# Altium PCB BBTC-PSU.PcbDoc
Units mil, origin at the board's own origin, x right, y up, seen from the top; angles counter-clockwise.
Board outline 3635 x 2610 mil, 2 copper layers (Top Layer, Bottom Layer); 36 components, 26 nets, 99 pads, 6 vias.
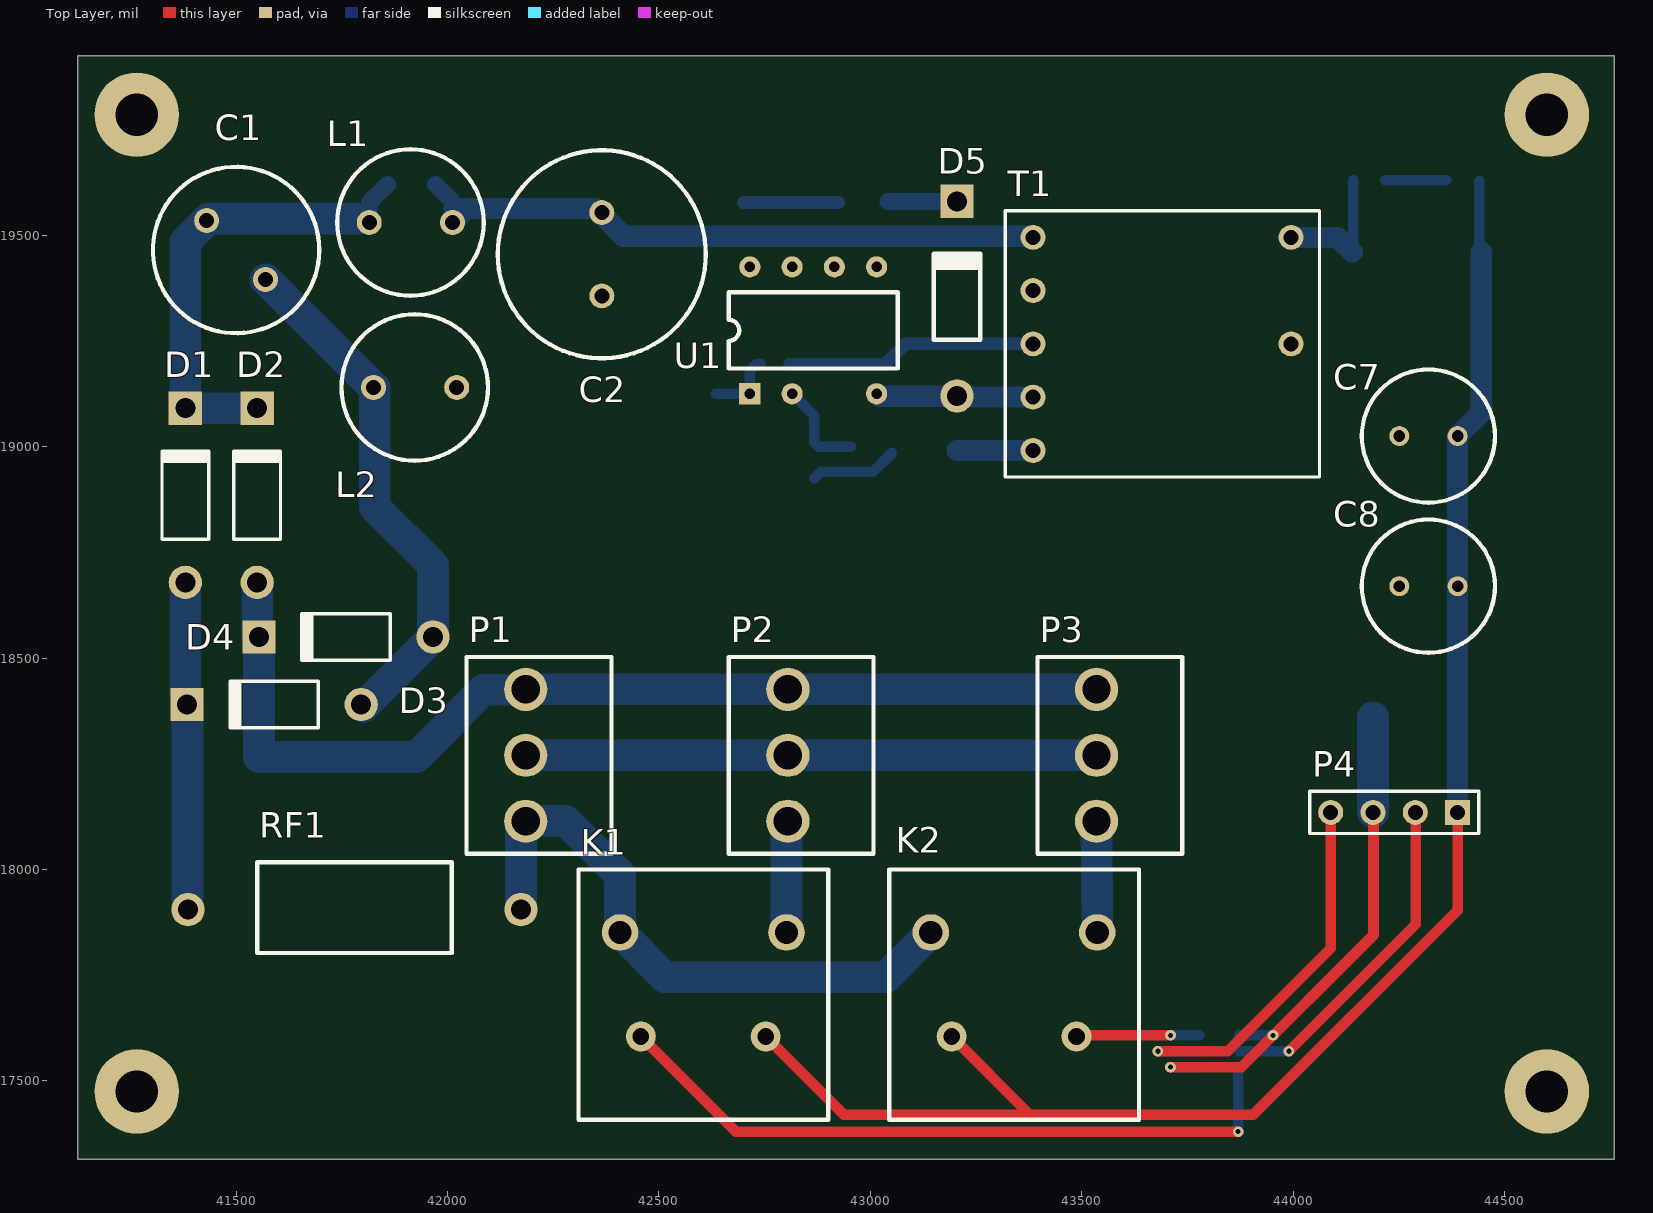
[diagram p0: Top Layer view]
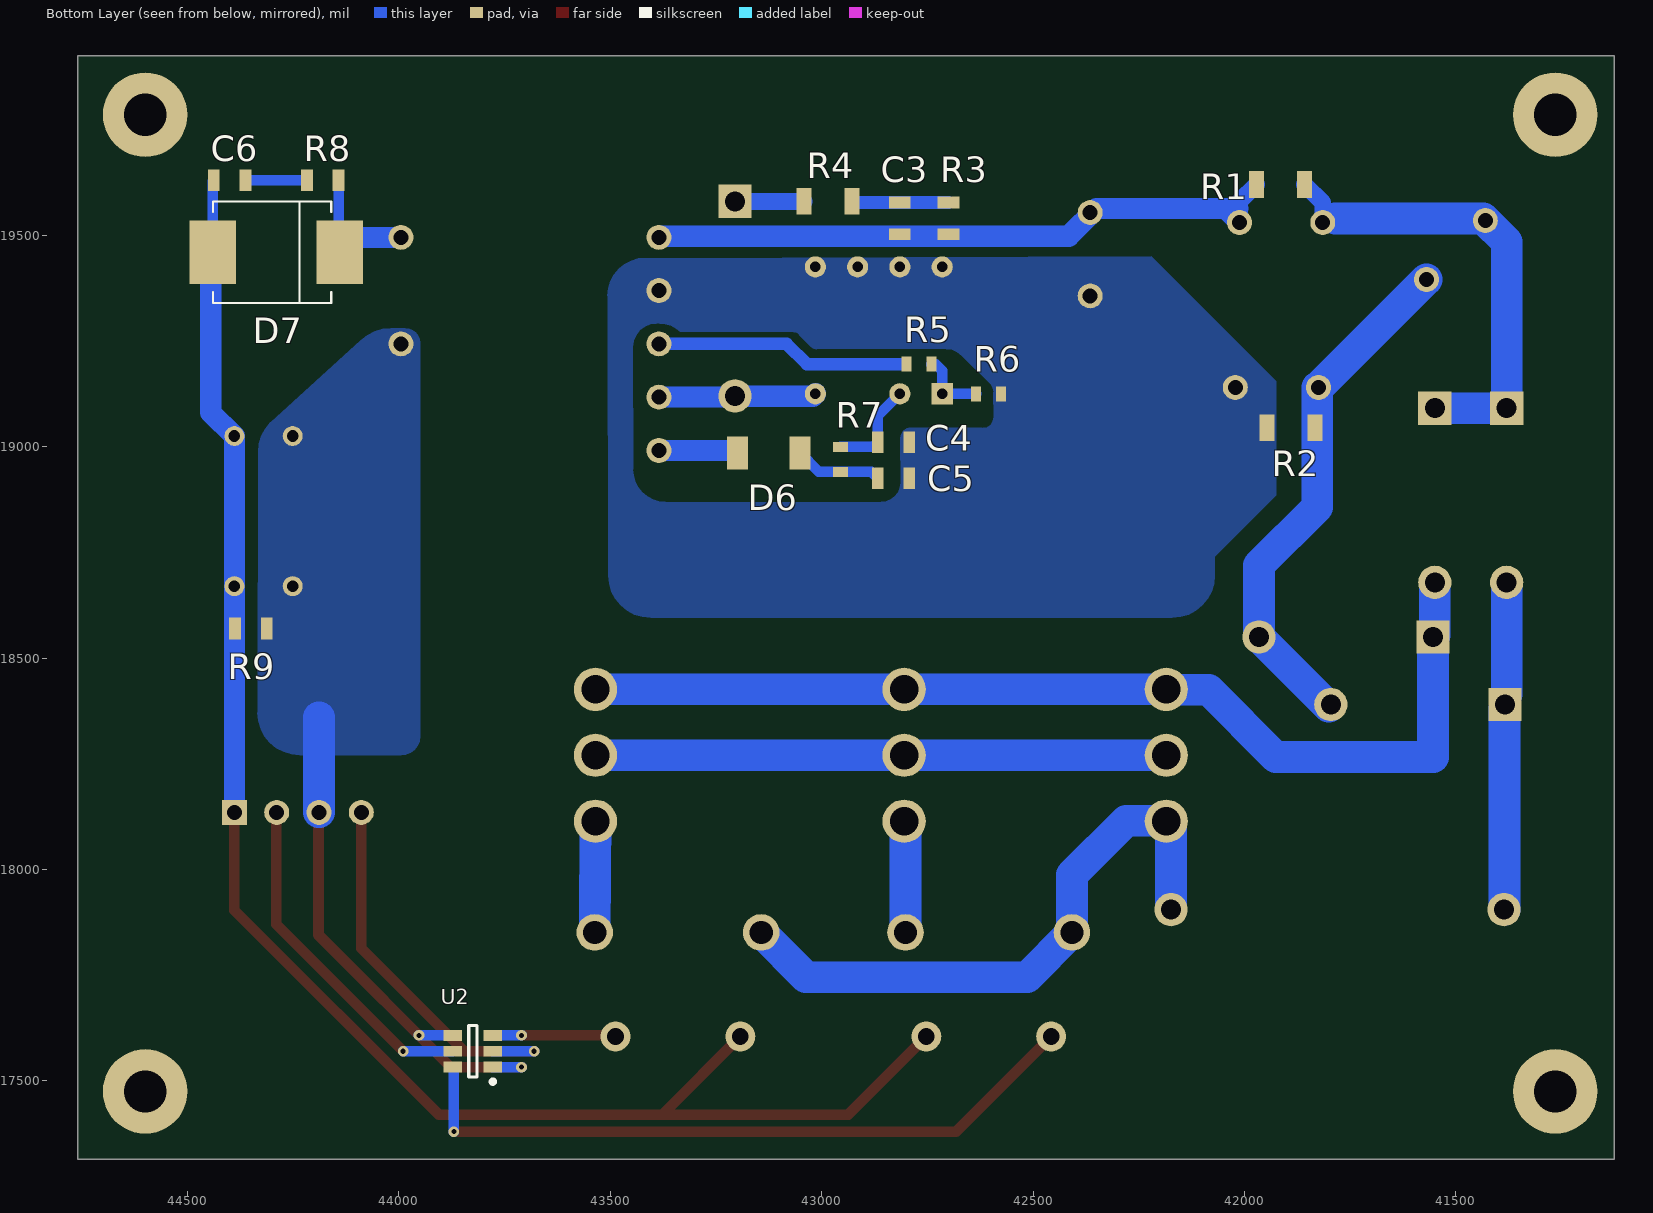
[diagram p1: Bottom Layer view, seen from below]

## Layer stack, top to bottom
Top Layer: signal copper 1.4
Dielectric: dielectric 12.6, FR-4, Dk 4.8
Bottom Layer: signal copper 1.4

## Board outline
41125,19925 41125,17315 41385,17315 44760,17315 44760,17520 44760,19925 41125,19925

## Design rules (kind name [scope] priority, off if disabled: settings)
Clearance [All] p1: gap=10
HoleSize [All] p1: absolutevalues=TRUE maxlimit=100 minlimit=10 maxpercent=80.000 minpercent=20.000
MinimumAnnularRing [All] p1: minimumring=6
MinimumSolderMaskSliver [All] p1: minsoldermaskwidth=3
PolygonConnect [All] p1: connectstyle=Direct reliefconductorwidth=10 reliefentries=4 polygonreliefangle="90 Angle"
RoutingVias [All] p1: holewidth=28 width=50 viastyle="Through Hole" minholewidth=28 minwidth=50 maxholewidth=28 maxwidth=50
SilkscreenOverComponentPads [All] p1: minsilkscreentomaskgap=10
SolderMaskExpansion [All] p1: expansion=4
Width [All] p1: maxlimit=100 minlimit=10 preferedwidth=10
25 further rules are at their usual default settings.

## Components (designator, comment, footprint, x,y, rotation, side; value= is the part's Value field where it differs from the comment)
C1 "4.7uF" CAP-10D-5L 41500,19465 r315 top
C2 "10uF" CAP-12.5D-5L 42365,19455 r270 top
C3 "1nF" 0805 42815,19540 r90 bottom
C4 "1uF" 0805 42830,19010 r180 bottom
C5 "10uF" 0805 42830,18925 r180 bottom
C6 "2.2nF" 0805 44400,19630 r180 bottom
C7 "470uF" CAP-8D-3.5L 44320,19025 r180 top
C8 "470uF" CAP-8D-3.5L 44320,18670 r180 top
D1 "Diode 1N4007" DO-41 41380,18885 r90 top
D2 "Diode 1N4007" DO-41 41550,18885 r90 top
D3 "Diode 1N4007" DO-41 41590,18390 r180 top
D4 "Diode 1N4007" DO-41 41760,18550 r180 top
D5 "Diode 1N4007" DIODE-WIDE 43205,19350 r90 top
D6 "LL4148" SOD-80 43125,18985 r180 bottom
D7 "SL44" DIODE_SMC 44290,19460 r0 bottom
K1 "Relay-SPST" PB134005 42605,17605 r90 top
K2 "Relay-SPST" PB134005 43340,17605 r90 top
L1 "1.5mH" TSL0808 41815,19530 r0 top
L2 "1.5mH" TSL0808 41825,19140 r0 top
P1 "AC_IN" B3P-VH(LF)(SN) 42185,18270 r90 top
P2 "AC_OUT_1" B3P-VH(LF)(SN) 42805,18270 r90 top
P3 "AC_OUT_2" B3P-VH(LF)(SN) 43535,18270 r90 top
P4 "Header 4" HDR1X4 44388.9,18135 r180 top
R1 "10K" 1206 41915,19620 r0 bottom
R2 "10K" 1206 41890,19045 r0 bottom
R3 "470K" 0805 42700,19540 r270 bottom
R4 "300" 1206 42985,19580 r180 bottom
R5 "14.7K" 0603 42770,19195 r180 bottom
R6 "9.76K" 0603 42605,19125 r180 bottom
R7 "6.2K" 0603 42955,18970 r90 bottom
R8 "100" 0805 44180,19630 r180 bottom
R9 "1.2K" 0805 44350,18570 r180 bottom
RF1 "10" "Res Wide" 41780,17905 r180 top
T1 "CWS-T1-RDR158" CWS-T1-RDR158 43385,19495 r0 top
U1 "LNK616PG" LNK6XX 42715,19125 r90 top
U2 "NUD3124" SOT23-6_N 43825,17570 r0 bottom

## Footprints (in the part's own frame and the unit in brackets; to place one, negate y for a bottom-side part, rotate by r counter-clockwise, add the part's x,y. Pads: shape width x height; smd on the part's side, far side on the other; paste and mask are expansions set on the pad)
0603 [mm]
  rect 0.6x0.9 smd: 1(-0.75,0) 2(0.75,0)
0805 [mm]
  rect 0.7x1.3 smd: 1(-0.95,0) 2(0.95,0)
1206 [mm] "SMT Device"
  rect 0.9x1.6 smd: 1(-1.45,0) 2(1.45,0)
B3P-VH(LF)(SN) [mm] "CONN HEADER VH TOP 3POS 3.96MM"
  round 2.6 hole 1.7: 1(-3.96,0) 2(0,0) 3(3.96,0)
  silkscreen extent -5.91,-5.15 5.91,3.55
CAP-8D-3.5L [mm] "Electrolytic 8mm Diameter 3.5mm Lead Spacing"
  round 1.2 hole 0.7: 1(-1.75,0) 2(1.75,0)
  silkscreen extent -4,-4 4,4
CAP-10D-5L [mm] "Electrolytic 10mm Diameter 5mm Lead Spacing"
  round 1.5 hole 0.9: 1(-2.5,0) 2(2.5,0)
  silkscreen extent -5,-5 5,5
CAP-12.5D-5L [mm] "Electrolytic 12.5mm Diameter 5mm Lead Spacing"
  round 1.5 hole 0.9: 1(-2.5,0) 2(2.5,0)
  silkscreen extent -6.25,-6.25 6.25,6.25
CWS-T1-RDR158 [mm]
  round 1.5 hole 0.9: 1(0,0) 2(0,-3.2) 3(0,-6.4) 4(0,-9.6) 5(0,-12.8) 8(15.5,-6.4) 10(15.5,0)
  silkscreen extent -1.67,-14.4 17.2,1.6
DIODE-WIDE [mm] "Through Hole Diode Wide pitch"
  round 2 hole 1.2: 1(-5.842,0)
  rect 2x2 hole 1.2: 2(5.842,0)
  silkscreen extent -2.47,-1.43 2.7,1.4
DIODE_SMC [mil] "Diode; 2 Leads"
  rect 110x150 smd: 1(-150,0) 2(150,0)
  silkscreen extent -130,-120 150,120
DO-41 [mm] "Diode, Axial; Body 5.2 x 2.7 mm (LxDia. max), Lead Dia. 0.86 mm (max)"
  round 2 hole 1.2: 1(-5.23,0)
  rect 2x2 hole 1.2: 2(5.23,0)
  silkscreen extent -2.65,-1.4 2.75,1.4
HDR1X4 [mm] "Connector; Header; 4 Position"
  rect 1.5x1.5 hole 0.9: 1(0,0)
  round 1.5 hole 0.9: 2(2.54,0) 3(5.08,0) 4(7.62,0)
  silkscreen extent -1.27,-1.27 8.89,1.27
LNK6XX [mil]
  rect 50x50 hole 25: 1(0,0)
  round 50 hole 25: 2(0,-100) 4(0,-300) 5(300,-300) 6(300,-200) 7(300,-100) 8(300,0)
  silkscreen extent 60,-350 240,50
PB134005 [mm] "SPST Relay"
  round 2.2 hole 1.4: 1(6.25,5) 2(6.25,-5)
  round 1.8 hole 1: 3(0,3.75) 4(0,-3.75)
  silkscreen extent -5,-7.5 10.02,7.5
"Res Wide" [mm]
  round 2 hole 1.2: 1(-10,0) 2(10,0)
  silkscreen extent -5.84,-2.85 5.84,2.6
SOD-80 [mm] "Mini-MELF"
  rect 1.25x2 smd: 1(-1.875,0) 2(1.875,0)
SOT23-6_N [mm] "SOT23, 6-Leads, Body 2.9x1.6mm, Pitch 0.95mm, Lead Span 2.7mm, IPC Medium Density"
  rect 1.1x0.65 smd: 1(-1.2,0.95) 2(-1.2,0) 3(-1.2,-0.95) 4(1.2,-0.95) 5(1.2,0) 6(1.2,0.95)
  silkscreen extent -1.32,-1.55 0.25,1.95, body extent -0.9,-1.55 0.9,1.55, height 1.45
TSL0808 [mm]
  round 1.5 hole 0.9: 1(0,0) 2(5,0)
  silkscreen extent -1.92,-4.4 6.88,4.4

## Part data
C1 C2 C7 C8: library part "Cap Pol1", "Polarized Capacitor (Radial)"
C3 C4 C5 C6: library part Cap, "Capacitor"
D1 D2 D3 D4 D5: "1 Amp General Purpose Rectifier"
D6: library part Diode, "Default Diode"
D7: library part "D Schottky", "Schottky Diode"
K1 K2: "Single-Pole Single-Throw Relay"
L1 L2: library part Inductor, "Inductor"
P1 P2 P3: library part "Header 3", "Header, 3-Pin"
P4: "Header, 4-Pin"
R1 R2 R3 R4 R5 R6 R7 R8 R9 RF1: library part Res1, "Resistor"
T1: "Flyback transformer"
U1: "Energy-Efficient, Accurate CV/CC Switcher  for Adapters and Chargers"
U2: "Automotive Inductive Load  Driver"

## Free pads (board coordinates)
  round 200 hole 100: 25(44600,17475) 26(41265,17475) 27(41265,19785) 28(44600,19785)

## Via types
v1: diameter 25, hole 12, Top Layer to Bottom Layer, 6 vias

## Nets (pads, with @x,y where several pads share a name; then routed paths per layer and width w, separated by ;. In a path a pad name is that pad's centre, name@x,y a point inside that pad or via, vN(x,y) a via of type N, cw(c..) or ccw(c..) an arc to the next point about the centre after c; other vN are vias at no path point)
5V: C6.1 C7.1 C8.1 D7.2 K1.4 K2.3 P4.1 R9.1 | length 3920
  Top Layer w25: K1.4 42937.64,17420 43905,17420 44388.9,17903.9 P4.1 ; K2.3 43376.18,17421.18
  Bottom Layer w25: D7.2 C6.1@44440,19627.4
  Bottom Layer w50: P4.1 C7.1 44445,19081.1 D7.2@44445,19460
IN_G: P1.2 P2.2 P3.2 | length 1340
  Bottom Layer w75: P1.2 P2.2@42795,18270 ; P2.2 P3.2
IN_L: K1.1 K2.1 P1.1 RF1.1 | length 1456.2
  Bottom Layer w75: RF1.1 42173.7,18115 42280,18115 42408.15,17986.85 42408.15,17851.06 42514.21,17745 43037.09,17745 K2.1@43143.15,17851.06
IN_N: D2.1 D4.2 P1.3 P2.3 P3.3 | length 2456
  Bottom Layer w75: D4.2@41550,18554.09 D2.1 ; D4.2 41554.09,18265.91 41554.24,18265.76 41925.76,18265.76 42085,18425 P1.3@42185,18425 ; P1.3 P2.3 P3.3
NetC1_1: C1.1 D1.2 D2.2 L1.1 R1.1 | length 1099
  Bottom Layer w40: L1.1 41815,19577.09 R1.1
  Bottom Layer w75: D2.2 D1.2 41380,19484.19 41435.4,19539.6 41785,19539.6
NetC1_2: C1.2 D3.1 D4.1 L2.1 R2.1 | length 1241.7
  Bottom Layer w75: C1.2 L2.1 ; D3.1@41800.91,18385 D4.1 41965.91,18719.09 41827.91,18857.09 41827.91,19045 L2.1@41827.91,19140
NetC2_1: C2.1 C3.1 L1.2 R1.2 R3.2 T1.1 | length 1550.7
  Bottom Layer w40: R1.2 42011.85,19580.24 L1.2
  Bottom Layer w50: L1.2 42045.28,19563.43 ; 42015.28,19563.43 42350,19563.43 42415.83,19497.6 T1.1@43385,19497.6
NetC2_2: C2.2 C4.2 C5.2 L2.2 R2.2 R6.2 T1.2 U1.5 U1.6 U1.7 U1.8
NetC3_2: C3.2 R3.1 R4.2 | length 225.5
  Bottom Layer w30: R3.1 R4.2@42925.51,19577.4
NetC4_1: C4.1 R7.2 U1.2 | length 228.6
  Bottom Layer w25: U1.2 42867.4,19072.6 C4.1 42877.87,18999.53 R7.2
NetC5_1: C5.1 D6.2 R7.1 | length 208.6
  Bottom Layer w25: C5.1 42882.87,18940.47 R7.1 43006.65,18940.47 D6.2
NetC6_2: C6.2 R8.1 | length 145.2
  Bottom Layer w25: R8.1 C6.2
NetD1_1: D1.1 D3.2 RF1.2 | length 740.9
  Bottom Layer w75: D3.2@41380,18414.09 D1.1 ; RF1.2@41385,17905 D3.2@41385,18380.91
NetD5_1: D5.1 T1.4 U1.4 | length 370.4
  Bottom Layer w50: U1.4 43020.91,19119.09 D5.1@43205,19119.09 ; D5.1@43207.05,19117.05 T1.4
NetD5_2: D5.2 R4.1 | length 162.9
  Bottom Layer w40: R4.1 D5.2
NetD6_1: D6.1 T1.5 | length 180.1
  Bottom Layer w50: D6.1@43204.88,18991.06 T1.5
NetD7_1: D7.1 R8.2 T1.10 | length 326.7
  Bottom Layer w25: D7.1@44142.6,19462.6 R8.2
  Bottom Layer w50: T1.10 44105,19495 D7.1
NetR5_1: R5.1 T1.3 | length 595.4
  Bottom Layer w30: R5.1@42809.53,19195 43035,19195 43083.03,19243.03 T1.3
NetR5_2: R5.2 R6.1 U1.1 | length 166.9
  Bottom Layer w25: R6.1 U1.1 42715,19179.53 42730.47,19195 R5.2
OUT_L_1: K1.2 P2.1 | length 270.8
  Bottom Layer w75: K1.2@42801.85,17851.06 P2.1@42801.85,18121.85
OUT_L_2: K2.2 P3.1 | length 273.9
  Bottom Layer w75: P3.1@43535,18125 K2.2@43536.85,17851.06
R1: K1.3 U2.6 | length 1656.2
  Top Layer w25: K1.3 42682.36,17380 v1(43870,17380)
  Bottom Layer w25: v1(43870,17380) U2.6@43870,17530.35
R1_CTL: P4.4 U2.2 | length 928.8
  Top Layer w25: v1(43680,17570) 43845,17570 44088.9,17813.9 P4.4
  Bottom Layer w25: v1(43680,17570) U2.2
R2: K2.4 U2.3 | length 287.8
  Top Layer w25: K2.4@43490.04,17607.4 v1(43710,17607.4)
  Bottom Layer w25: v1@43710,17607.5 43710.1,17607.4 U2.3
R2_CTL: P4.2 U2.5 | length 807
  Top Layer w25: v1(43990,17570) 44290,17870 P4.2@44290,18135
  Bottom Layer w25: U2.5 v1(43990,17570)
RTN: C7.2 C8.2 P4.3 R9.2 T1.8 U2.1 U2.4 | length 1272.3
  Top Layer w25: v1(43710,17532.6) 43877.6,17532.6 44190,17845 P4.3@44190,18135
  Bottom Layer w25: v1(43710,17532.6) U2.1 ; U2.4 v1(43952.4,17607.4)
  Bottom Layer w75: P4.3 44188.9,18360

## Polygon pours and split planes (outlines as drawn)
RTN on Bottom Layer "Top Layer-No Net" (solid, remove dead copper, pour order 4): 43985,19280 ccw(c43985,19245) 43950,19245 43950,18315 ccw(c43995,18315) 43995,18270 44234.29,18270.71 ccw(c44234.29,18370.71) 44334.29,18370.71 44332.61,18986.73 ccw(c44232.61,18986.73) 44303.32,19057.44 44089.29,19250.71 ccw(c44018.58,19180) 44018.58,19280
NetC2_2 on Bottom Layer "Top Layer-No Net" (solid, remove dead copper, pour order 2): 43435,19445 43380,19445 43416.36,19446.36 cw(c43416.36,19356.36) 43506.36,19356.36 43504.29,18695.71 cw(c43404.29,18695.71) 43404.29,18595.71 42170.71,18595.71 cw(c42170.71,18695.71) 42070.71,18695.71 42070,18740 41925,18885 41925,19155 42220,19450

## Other copper
Bottom Layer:
  pour cut-out: 43067.07,19270 ccw(c43067.07,19252.93) 43055,19265 43027.07,19237.07 cw(c43010,19254.14) 43010,19230 42706.21,19230 ccw(c42706.21,19178.79) 42670,19215 42602.07,19147.07 ccw(c42619.14,19130) 42595,19130 42595,19069.14 ccw(c42619.14,19069.14) 42619.14,19045 42790,19045 cw(c42790,19020) 42815,19020 42815,18915 ccw(c42860,18915) 42860,18870 43369.06,18870 ccw(c43369.06,18945.71) 43444.77,18945.71 43444.77,19235.7 ccw(c43390,19235.7) 43390,19290.47 43384.43,19290.47 ccw(c43384.43,19220.57) 43335,19270